# EAGLE board External_Controls_Board (EAGLE 6.5.0)
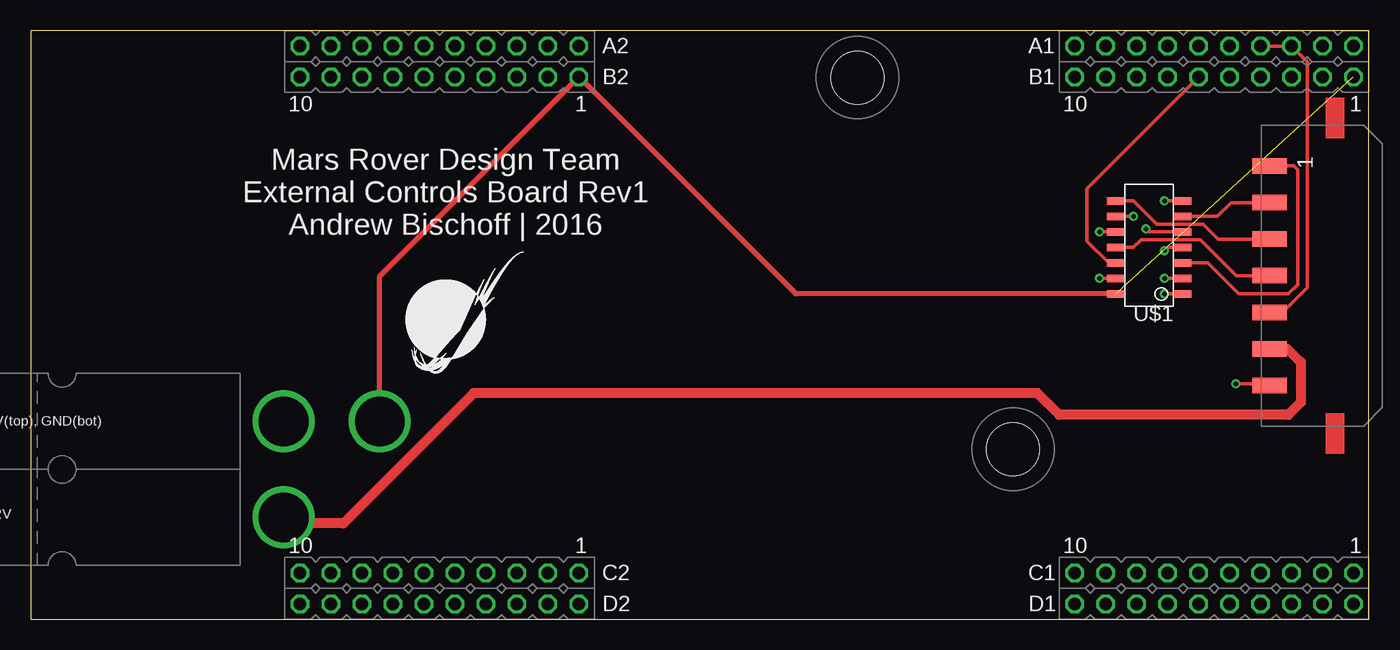
[diagram p0: board, top side]
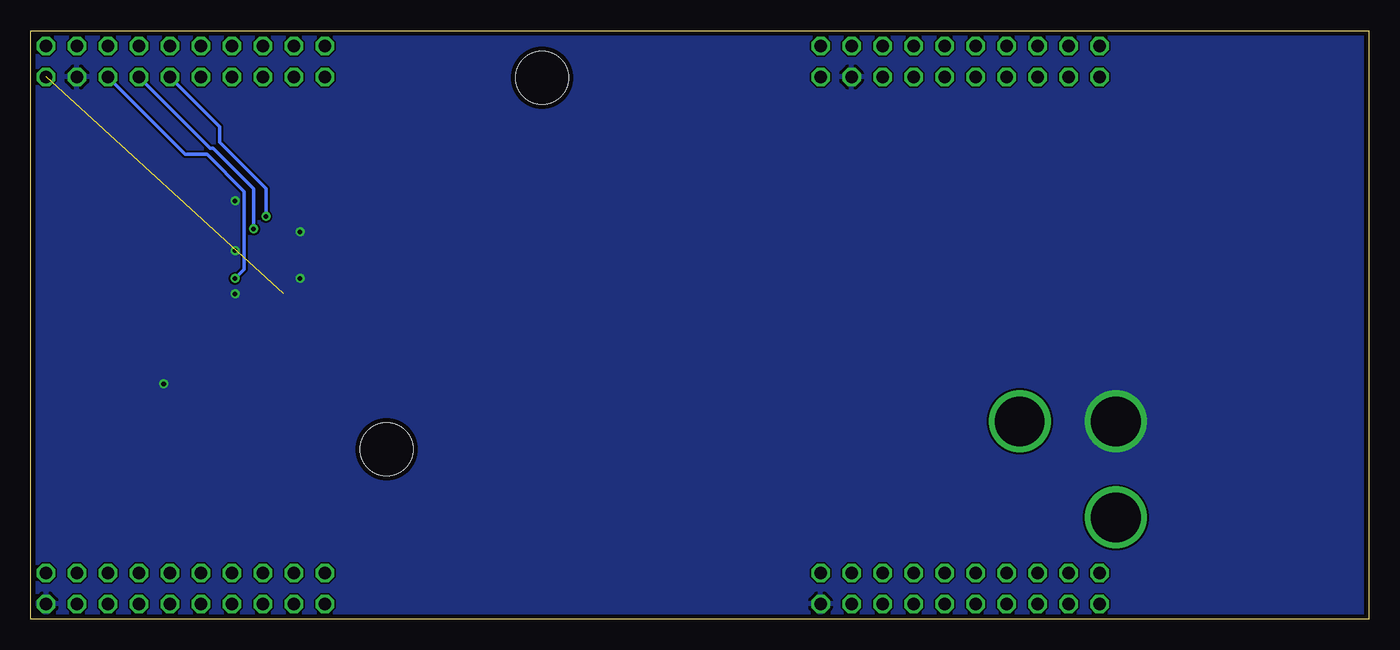
[diagram p1: board, bottom side, seen from below]

Size 109.73 x 48.26 mm. Coordinates in mm from the lower left corner, seen from the top.
Outline: 0,0 109.73,0 109.73,48.26 0,48.26 0,0
Copper layers (1*16): Top 0.0356mm / dielectric 1.5011mm / Bottom 0.0356mm
Design rules "LaenPCBOrder": minimum track width 6mil, minimum drill 13mil, track to track 6mil, track to pad 6mil, pad to pad 6mil, via to via 6mil, smd to smd 6mil, copper to edge 15mil, drill to drill 6mil, minimum pad ring 7mil, minimum via ring 7mil, stop-mask expansion 3mil, vias tented up to drill 0mil, thermal gap 10mil

## Footprints (pad centres in the part's own frame; a part is rotated, then mirrored left to right if it is on the bottom)
SOIC14 = smd 1.5 x 0.6: 1 1.11,10.16; 2 1.11,8.89; 3 1.11,7.62; 4 1.11,6.35; 5 1.11,5.08; 6 1.11,3.81; 7 1.11,2.54; 8 6.51,2.54; 9 6.51,3.81; 10 6.51,5.08; 11 6.51,6.35; 12 6.51,7.62; 13 6.51,8.89; 14 6.51,10.16
TIVA-C-CONNECTED = drill 1.016 octagon: +3V3_1 59.69,54.61; +3V3_2 123.19,54.61; +5V_1 59.69,52.07; +5V_2 123.19,52.07; GND_1 57.15,52.07; GND_2 59.69,8.89; GND_3 120.65,52.07; GND_4 123.19,8.89; PA4 39.37,52.07; PA5 36.83,52.07; PA6 105.41,52.07; PA7 52.07,8.89; PB2 102.87,54.61; PB3 100.33,54.61; PB4 54.61,52.07; PB5 52.07,52.07; PC4 118.11,54.61; PC5 115.57,54.61; PC6 113.03,54.61; PC7 105.41,54.61; PD0 107.95,8.89; PD1 110.49,8.89; PD2 57.15,54.61; PD3 107.95,54.61; PD4 49.53,54.61; PD5 46.99,54.61; PD7 107.95,52.07; PE0 118.11,52.07; PE1 115.57,52.07; PE2 113.03,52.07; PE3 110.49,52.07; PE4 120.65,54.61; PE5 110.49,54.61; PF1 123.19,11.43; PF2 120.65,11.43; PF3 118.11,11.43; PG0 115.57,11.43; PG1 59.69,11.43; PH0 44.45,11.43; PH1 41.91,11.43; PH2 118.11,8.89; PH3 115.57,8.89; PK0 49.53,52.07; PK1 46.99,52.07; PK2 44.45,52.07; PK3 41.91,52.07; PK4 57.15,11.43; PK5 54.61,11.43; PK6 39.37,11.43; PK7 36.83,11.43; PL0 107.95,11.43; PL1 105.41,11.43; PL2 102.87,11.43; PL3 100.33,11.43; PL4 113.03,11.43; PL5 110.49,11.43; PM0 52.07,11.43; PM1 49.53,11.43; PM2 46.99,11.43; PM3 120.65,8.89; PM4 102.87,52.07; PM5 100.33,52.07; PM6 36.83,8.89; PM7 57.15,8.89; PN2 105.41,8.89; PN3 102.87,8.89; PN4 36.83,54.61; PN5 39.37,54.61; PP0 54.61,54.61; PP1 52.07,54.61; PP2 100.33,8.89; PP3 41.91,8.89; PP4 41.91,54.61; PP5 54.61,8.89; PQ0 44.45,54.61; PQ1 39.37,8.89; PQ2/PA3 46.99,8.89; PQ3/PA2 44.45,8.89; RST1 49.53,8.89; RST_2 113.03,8.89
APP45_5V_12V_HORIZ_CONFIG = drill 4.064: 5V 36.068,11.811; 12V 28.194,3.937; GND 28.194,11.811
MOLEX_43650-07 = smd 1.27 x 2.794: P_1 8.966,4.851; P_2 5.969,4.851; P_3 2.972,4.851; P_4 -0.025,4.851; P_5 -3.023,4.851; P_6 -6.02,4.851; P_7 -9.017,4.851
#8_SCREW = hole 4.318: 0,0

## Placement (x,y rotation side)
U$1  SN74AHCT125  [SOIC14]  95.5,36.83 180 top
U$2  TIVA-C-CONNECTED  [TIVA-C-CONNECTED]  -14.73,-7.62 0 top
U$3  APP_3POS_CONFIG5V_12V_HORIZ  [APP45_5V_12V_HORIZ_CONFIG]  -7.44,4.42 0 top
U$4  M07  [MOLEX_43650-07]  106.43,28.19 90 top
U$5  MOUNTING_HOLE#8  [#8_SCREW]  80.54,13.94 0 top
U$6  MOUNTING_HOLE#8  [#8_SCREW]  67.79,44.4 0 top
U$7  [MRDT_LOGO]  30.73,19.3 0 top

## Library data of the parts
U$1 = MRDT-Digital-ICs
U$2 U$7 = MRDT-2015-General
U$3 = MRDT-Connectors; COLOR1: YELLOW; COLOR2: RED; COLOR3: BLACK
U$4 = MRDT-Connectors
U$5 U$6 = MRDT-Hardware

## Nets
+5V: U$1.14 U$2.+5V_1 U$2.+5V_2 U$3.5V
+12V: U$3.12V U$4.P_6
DYNA_DATA: U$2.PC4 U$2.PC5 U$4.P_5
GND: U$1.1 U$1.4 U$1.7 U$1.10 U$1.13 U$2.GND_1 U$2.GND_2 U$2.GND_3 U$2.GND_4 U$3.GND U$4.P_7
PWM0_3.3: U$1.12 U$2.PE3
PWM0_5: U$1.11 U$4.P_4
PWM1_3.3: U$1.9 U$2.PE2
PWM1_5: U$1.8 U$4.P_3
PWM2_3.3: U$1.5 U$2.PE1
PWM2_5: U$1.6 U$4.P_2
PWM3_3.3: U$1.2 U$2.PE0
PWM3_5: U$1.3 U$4.P_1

## Tracks (layer width: path | path; a pad name or v marks a point on that pad's centre or on a via)
+5V  (1 unrouted)
  Top 0.406: U$1.14 62.74,26.67 U$2.+5V_1 28.63,28.12 U$3.5V
+12V
  Top 0.406: 21.23,7.87 U$3.12V
  Top 0.813: U$4.P_6 103.05,22.17 104.14,21.08 104.14,17.78 103.12,16.76 84.33,16.76 82.55,18.54 36.32,18.54 25.65,7.87 21.23,7.87
DYNA_DATA
  Top 0.279: U$4.P_5 102.64,25.17 104.65,27.18 104.65,45.72 U$2.PC4 U$2.PC5
GND  (via drill 0.38)
  Top 0.305: U$1.13 v87.63,27.94 | U$1.10 v87.63,31.75 | U$1.7 v92.96,34.29 | U$1.4 93.22,30.48 v92.96,30.23 | U$1.1 v92.96,26.67 | U$4.P_7 101.47,19.18 101.35,19.3 v98.81,19.3
  pour Bottom: -14.73,-17.78 112.27,-17.78 112.27,50.8 -14.73,50.8
PWM0_3.3
  Top 0.305: U$1.12 88.39,29.21 86.61,30.99 86.61,35.31 U$2.PE3
PWM0_5
  Top 0.279: U$4.P_4 98.83,28.17 95.89,31.11 91.06,31.11 90.42,30.48 U$1.11
PWM1_3.3  (via drill 0.38)
  Top 0.305: U$1.9 v90.42,33.02
  Bottom 0.305: v90.42,33.02 90.42,35.31 94.23,39.12 94.23,40.39 U$2.PE2
PWM1_5
  Top 0.279: U$4.P_3 97.36,31.17 96.14,32.39 92.33,32.39 90.42,34.29 U$1.8
PWM2_3.3  (via drill 0.38)
  Top 0.305: U$1.5 91.69,31.75 v91.44,32
  Bottom 0.305: v91.44,32 91.44,35.31 94.74,38.61 95,38.61 U$2.PE1
PWM2_5
  Top 0.279: U$4.P_2 98.42,34.16 97.28,33.02 U$1.6
PWM3_3.3  (via drill 0.38)
  Top 0.305: U$1.2 v92.96,27.94
  Bottom 0.305: v92.96,27.94 92.2,28.7 92.2,35.05 95.25,38.1 97.03,38.1 U$2.PE0
PWM3_5
  Top 0.279: U$4.P_1 103.56,37.16 103.89,36.83 103.89,27.43 103.12,26.67 99.06,26.67 96.52,29.21 U$1.3

## Text on the board
tPlace: Mars Rover Design Team / External Controls Board Rev1 / Andrew Bischoff | 2016